# Altium PCB PCB.PcbDoc (part 2 of 3)
Units mm, origin at the board's own origin, x right, y up, seen from the top; angles counter-clockwise.
Board outline 224 x 132 mm, 4 copper layers (Top Layer, Signal Layer 1, Signal Layer 2, Bottom Layer), stack 0.778 mm thick; 181 components, 179 nets, 1018 pads, 539 vias.
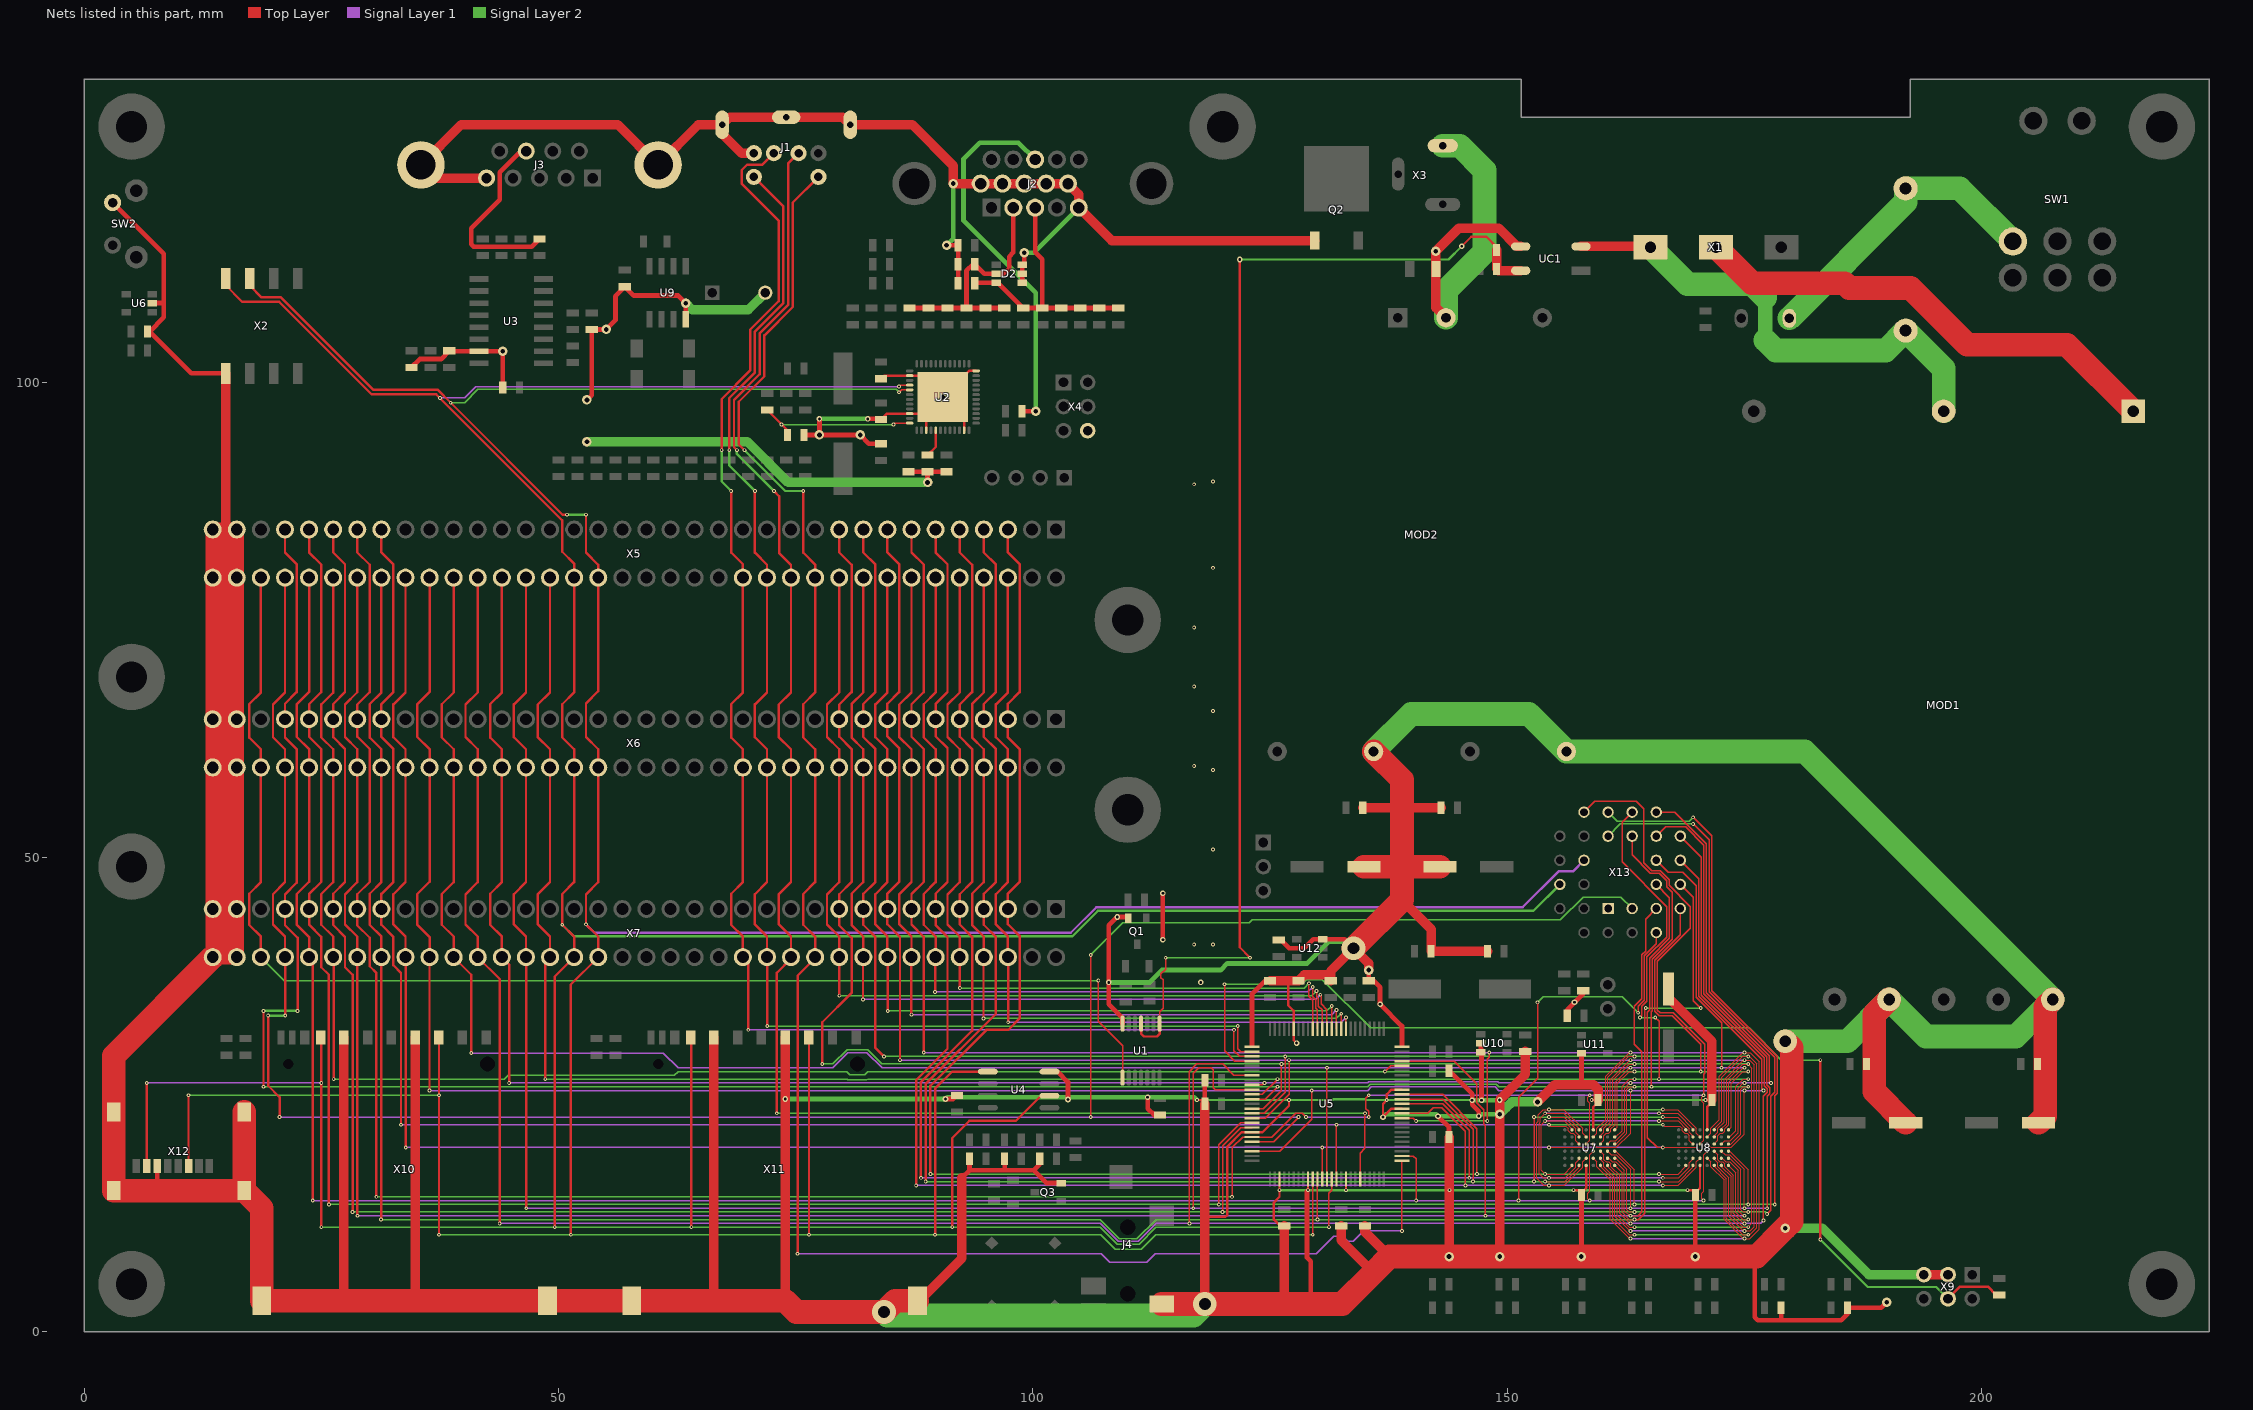
[diagram p4: the nets of this part, all layers, seen from the top]

## Via types
v1: diameter 0.4, hole 0.2, Top Layer to Bottom Layer, tented both sides, 453 vias
v2: diameter 0.6, hole 0.3, Top Layer to Bottom Layer, tented both sides, 46 vias
v3: diameter 1, hole 0.5, Top Layer to Bottom Layer, tented both sides, 34 vias
v4: diameter 2.5, hole 1.25, Top Layer to Bottom Layer, tented both sides, 5 vias
v5: diameter 1, hole 0.5, Top Layer to Bottom Layer, tented bottom, 1 vias

## Nets (pads, with @x,y where several pads share a name; then routed paths per layer and width w, separated by ;. In a path a pad name is that pad's centre, name@x,y a point inside that pad or via, vN(x,y) a via of type N, cw(c..) or ccw(c..) an arc to the next point about the centre after c; other vN are vias at no path point) (continued)
A7: U5.90 U7.C4 U8.C4 X5.57 X6.57 X7.57 | length 213.4
  Top Layer w0.125: v1(154.4,21.8) 154.538,21.662 156.186,21.662 156.435,21.413 156.435,21.138 156.697,20.875 156.973,20.875 157.2,20.648 157.2,20.135 U7.C4@157.573,19.763 ; v1(166.4,21.8) 166.537,21.662 168.186,21.662 168.435,21.413 168.435,21.138 168.697,20.875 168.973,20.875 169.2,20.648 169.2,20.135 U8.C4@169.573,19.763
  Top Layer w0.15: U5.90@132,16.075 v1(132,21.8)
  Top Layer w0.25: X5.57@31.33,84.54 31.33,82.13 32.6,80.86 32.6,67.4 31.33,66.13 31.33,62.67 32.6,61.4 32.6,47.4 31.33,46.13 31.33,42.87 32.6,41.6 32.6,38.6 33.4,37.8 v1(33.4,21.8)
  Signal Layer 1 w0.15: v1(33.4,21.8) v1(154.4,21.8)
  Signal Layer 2 w0.15: v1(154.4,21.8) v1(166.4,21.8)
A8: U5.70 U7.D4 U8.D4 X5.59 X6.59 X7.59 X13.18 | length 277.8
  Top Layer w0.125: U7.D4@158.323,19.763 158.7,20.14 158.7,24.052 158.5,24.252 158.5,24.7 v1(158.7,24.9) ; U8.D4@170.323,19.763 170.7,20.14 170.7,24.052 170.5,24.252 170.5,24.7 v1(170.7,24.9)
  Top Layer w0.15: v1(121,14.2) 121,19.4 122.1,20.5 U5.70@123.1,20.5 125.2,20.5 127.7,23 128.4,23 v1(128.8,22.6) ; v1(135.4,22.6) 135.4,23.2 135.1,23.5 135.1,24.6 v1(135.4,24.9) ; X13.18@158.09,54.75 159.24,55.9 163.6,55.9 164.4,55.1 164.4,49.389 165.214,48.575 166.114,48.575 167.075,47.614 167.075,47.025 169.3,44.8 169.3,42.5 165.825,39.025 165.825,33.875 166.125,33.575 167.514,33.575 170.8,30.289 170.8,27.2 170.7,27.1 v1(170.7,24.9)
  Top Layer w0.25: X5.59@28.79,84.54 28.79,82.13 30.1,80.82 30.1,67.4 28.79,66.09 28.79,62.71 30.1,61.4 30.1,47.4 28.79,46.09 28.79,42.81 30.1,41.5 30.1,38.5 30.8,37.8 v1(30.8,14.2)
  Signal Layer 1 w0.15: v1(128.8,22.6) v1(135.4,22.6) ; v1(135.4,24.9) v1(158.7,24.9) v1(170.7,24.9)
  Signal Layer 2 w0.15: v1(30.8,14.2) v1(121,14.2)
A9: U5.68 U7.H2 U8.H2 X5.61 X6.61 X7.61 X13.17 | length 303.3
  Top Layer w0.125: U7.H2@161.323,18.263 161.439,18.263 162.6,17.102 162.6,12.852 162.852,12.6 v1(163.4,12.6) ; U8.H2@173.323,18.263 173.439,18.263 174.6,17.102 174.6,12.852 174.852,12.6 v1(175.4,12.6)
  Top Layer w0.15: v1(120,12.6) 120,19.6 121.9,21.5 U5.68@123.1,21.5 ; v1(169.6,53.5) 171.275,51.825 171.275,35.814 178.2,28.889 178.2,25.222 177.8,24.822 177.8,12.8 v1(177.4,12.4)
  Top Layer w0.25: X5.61@26.25,84.54 26.25,82.13 27.5,80.88 27.5,67.4 26.25,66.15 26.25,62.65 27.5,61.4 27.5,47.4 26.25,46.15 26.25,42.85 27.5,41.6 27.5,38.4 28.3,37.6 v1(28.3,12.6)
  Signal Layer 2 w0.15: v1(28.3,12.6) v1(163.4,12.6) v1(175.4,12.6) 177.2,12.6 v1(177.4,12.4) ; X13.17@160.63,52.21 161.92,53.5 v1(169.6,53.5)
A10: U5.67 U7.H3 U8.H3 X5.63 X6.63 X7.63 X13.16 | length 304.5
  Top Layer w0.125: U7.H3@161.323,19.013 161.441,19.013 163.4,17.054 v1(163.4,13.4) ; U8.H3@173.323,19.013 173.441,19.013 175.4,17.054 v1(175.4,13.4)
  Top Layer w0.15: v1(119.6,13.4) 119.6,19.7 121.9,22 U5.67@123.1,22 ; v1(169.6,54.2) 171.55,52.25 171.55,35.928 178.475,29.003 178.475,25.108 178.2,24.833 v1(178.2,13.4)
  Top Layer w0.25: X5.63@23.71,84.54 23.71,82.13 25,80.84 25,67.4 23.71,66.11 23.71,62.69 25,61.4 25,47.4 23.71,46.11 23.71,42.89 25,41.6 25,38.4 25.8,37.6 v1(25.8,13.4)
  Signal Layer 2 w0.15: v1(25.8,13.4) v1(163.4,13.4) v1(175.4,13.4) v1(178.2,13.4) ; X13.16@160.63,54.75 161.605,53.775 169.175,53.775 v1(169.6,54.2)
A11: U5.62 U7.H4 U8.H4 X5.65 X6.65 X7.65 X13.15 | length 269.1
  Top Layer w0.125: U7.H4@161.323,19.763 161.463,19.763 162.612,20.912 162.612,25.561 162.852,25.8 v1(163.4,25.8) ; U8.H4@173.323,19.763 173.563,19.763 174.613,20.813 174.613,25.561 174.852,25.8 v1(175.4,25.8)
  Top Layer w0.15: U5.62@123.1,24.5 124.5,24.5 v1(125.8,25.8) ; X13.15@163.17,52.21 163.17,50.23 165.1,48.3 166,48.3 166.8,47.5 166.8,46.9 167.375,46.325 167.375,41.353 165.275,39.253 165.275,33.786 165.2,33.711 v1(165.2,25.8)
  Top Layer w0.25: v1(18.9,25.8) v1(18.9,33.8) ; X5.65@21.17,84.54 21.17,82.13 22.4,80.9 22.4,67.4 21.17,66.17 21.17,62.63 22.4,61.4 22.4,47.3 21.17,46.07 21.17,42.83 22.5,41.5 v1(22.5,33.8)
  Signal Layer 2 w0.15: v1(18.9,25.8) v1(125.8,25.8) 135.311,25.8 135.561,26.05 148.85,26.05 149.1,25.8 v1(163.4,25.8) v1(175.4,25.8)
  Signal Layer 2 w0.25: v1(18.9,33.8) v1(22.5,33.8)
A12: U5.61 U7.H5 U8.H5 X5.44 X6.44 X7.44 X13.14 | length 233.6
  Top Layer w0.125: U7.H5@161.323,20.513 161.452,20.513 162.113,21.173 162.113,25.86 162.852,26.6 v1(163.4,26.6) ; U8.H5@173.323,20.513 173.452,20.513 174.112,21.173 174.112,25.86 174.852,26.6 v1(175.4,26.6)
  Top Layer w0.15: U5.61@123.1,25 124.2,25 v1(125.8,26.6) ; X13.14@163.17,54.75 162.1,53.68 162.1,49.5 166.825,44.775 166.825,41.581 164.725,39.481 164.725,34.825 164.2,34.3 164.2,33.3 v1(164,33.1) ; v1(165.6,33.1) 166,32.7 v1(166,26.6)
  Top Layer w0.25: v1(48.6,26.6) 48.6,38.95 X7.44@49.11,39.46 49.11,41.63 47.8,42.94 47.8,46.06 49.11,47.37 49.11,61.37 47.8,62.68 47.8,66.06 49.11,67.37 X5.44@49.11,79.46
  Signal Layer 2 w0.15: v1(48.6,26.6) 80.422,26.6 80.497,26.525 82.503,26.525 82.578,26.6 v1(125.8,26.6) v1(163.4,26.6) v1(175.4,26.6) ; v1(164,33.1) v1(165.6,33.1)
A13: U5.60 U7.G3 U8.G3 X5.46 X6.46 X7.46 X13.13 | length 284.3
  Top Layer w0.125: U7.G3@160.573,19.013 160.96,18.625 161.475,18.625 163,17.1 v1(163,13) ; U8.G3@172.573,19.013 172.96,18.625 173.475,18.625 175,17.1 v1(175,13)
  Top Layer w0.15: v1(116.9,13) 116.9,27.2 117.5,27.8 118.8,27.8 119,27.6 119,25.7 119.2,25.5 U5.60@123.1,25.5 ; X13.13@165.71,52.21 166.7,53.2 168.8,53.2 170.725,51.275 170.725,35.586 177.363,28.949 177.363,26.026 177.675,25.714 177.675,25.086 177.4,24.811 v1(177.4,13)
  Top Layer w0.25: v1@46.57,13 v1(46.6,13) 46.6,39.43 X7.46@46.57,39.46 46.57,41.63 45.3,42.9 45.3,46.1 46.57,47.37 46.57,61.37 45.3,62.64 45.3,66.1 46.57,67.37 X5.46@46.57,79.46
  Signal Layer 1 w0.15: v1(46.6,13) v1(163,13) v1(175,13) v1(177.4,13)
A14: U5.59 U7.G4 U8.G4 X5.48 X6.48 X7.48 X13.12 | length 240.4
  Top Layer w0.125: U7.G4@160.573,19.763 160.935,20.125 161.45,20.125 162.362,21.037 162.362,25.664 162.898,26.2 v1(163,26.2) ; U8.G4@172.573,19.763 172.935,20.125 173.525,20.125 174.363,20.963 174.363,25.664 174.898,26.2 v1(175,26.2)
  Top Layer w0.15: U5.59@123.1,26 124.2,26 v1(124.4,26.2) ; X13.12@165.71,54.75 167.639,54.75 171,51.389 171,35.7 177.638,29.062 177.638,26.362 v1(177.8,26.2)
  Top Layer w0.25: X5.48@44.03,79.46 44.03,67.37 42.8,66.14 42.8,62.6 44.03,61.37 44.03,47.37 42.8,46.14 42.8,42.86 44.03,41.63 X7.48@44.03,39.46 44.8,38.69 v1(44.8,26.2)
  Signal Layer 1 w0.15: v1(44.8,26.2) v1(124.4,26.2) 135.3,26.2 135.425,26.325 148.975,26.325 149.1,26.2 v1(163,26.2) v1(175,26.2) v1(177.8,26.2)
A15: U5.57 U7.F3 U8.F3 X5.50 X6.50 X7.50 X13.11 | length 292.2
  Top Layer w0.125: U7.F3@159.823,19.013 160.2,18.635 160.2,18.123 160.423,17.9 160.698,17.9 160.935,17.663 160.935,17.365 161.85,16.45 161.85,12.448 162.898,11.4 v1(163,11.4) ; U8.F3@171.823,19.013 172.2,18.635 172.2,18.123 172.423,17.9 172.698,17.9 172.935,17.663 172.935,17.365 173.85,16.45 173.85,12.448 174.898,11.4 v1(175,11.4)
  Top Layer w0.15: v1(116.5,11.4) 116.5,27.4 117.3,28.2 120,28.2 121.2,27 U5.57@123.1,27 ; X13.11@168.25,52.21 170.45,50.01 170.45,35.472 177.088,28.835 177.088,25.912 177.4,25.6 177.4,25.2 177,24.8 v1(177,11.7)
  Top Layer w0.25: X5.50@41.49,79.46 41.49,67.37 40.2,66.08 40.2,62.66 41.49,61.37 41.49,47.37 40.2,46.08 40.2,42.92 41.49,41.63 X7.50@41.49,39.46 43.8,37.15 v1(43.8,11.4)
  Signal Layer 1 w0.15: v1(43.8,11.4) 107.111,11.4 109.011,9.5 111.089,9.5 112.989,11.4 v1(163,11.4) v1(175,11.4) 176.7,11.4 v1(177,11.7)
A16: U5.88 U7.F4 U8.F4 X5.52 X6.52 X7.52 X13.10 | length 245.6
  Top Layer w0.125: U7.F4@159.823,19.763 160.2,20.14 160.2,20.653 160.447,20.9 160.722,20.9 160.935,21.113 160.935,21.388 161.362,21.815 161.362,26.264 162.898,27.8 v1(163,27.8) ; U8.F4@171.823,19.763 172.2,20.14 172.2,20.653 172.447,20.9 172.722,20.9 172.935,21.113 172.935,21.388 173.362,21.815 173.362,26.264 174.898,27.8 v1(175,27.8)
  Top Layer w0.15: U5.88@131,16.075 v1(131,27.8) ; X13.10@165.71,49.67 166.98,48.4 168.5,48.4 169.9,47 169.9,35.244 172.6,32.544 v1(172.6,27.8)
  Top Layer w0.25: X5.52@38.95,79.46 38.95,67.37 37.7,66.12 37.7,62.62 38.95,61.37 38.95,47.37 37.7,46.12 37.7,42.88 38.95,41.63 X7.52@38.95,39.46 40.8,37.61 v1(40.8,29.35)
  Signal Layer 1 w0.15: v1(40.8,29.35) 61.05,29.35 62.6,27.8 78.9,27.8 80.5,29.4 82.5,29.4 84.1,27.8 v1(163,27.8) v1(175,27.8)
A17: U5.73 U7.E4 U8.E4 X5.54 X6.54 X7.54 X13.9 | length 254.2
  Top Layer w0.125: U7.E4@159.073,19.763 159.435,19.4 161.5,19.4 163,20.9 v1(163,25.4) ; U8.E4@171.073,19.763 171.435,19.4 173.6,19.4 175,20.8 v1(175,25.4)
  Top Layer w0.15: U5.73@123.1,19 126,19 129.4,22.4 v1(129.4,25.4) ; X13.9@168.25,49.67 170.175,47.745 170.175,35.358 176.813,28.721 176.813,25.587 v1(177,25.4)
  Top Layer w0.25: v1(36.4,25.4) 36.4,39.45 X7.54@36.41,39.46 36.41,41.59 35.1,42.9 35.1,46.1 36.41,47.41 36.41,61.39 35.1,62.7 35.1,66.1 36.41,67.41 X5.54@36.41,79.46
  Signal Layer 1 w0.15: v1(36.4,25.4) v1(129.4,25.4) 135.3,25.4 135.675,25.775 148.725,25.775 149.1,25.4 v1(163,25.4) v1(175,25.4) v1(177,25.4)
A18: U5.87 U7.D3 U8.D3 X5.56 X6.56 X7.56 X13.8 | length 236.5
  Top Layer w0.125: v1(154.4,19.4) 157.935,19.4 U7.D3@158.323,19.013 ; 165.8,19.4 v1(166.4,19.4) 169.935,19.4 U8.D3@170.323,19.013
  Top Layer w0.15: U5.87@130.5,16.075 v1(130.5,19.4) ; X13.8@165.71,47.13 167.1,45.74 167.1,41.467 165,39.367 165,33.9 164.75,33.65 164.75,20.45 165.8,19.4
  Top Layer w0.25: X5.56@33.87,79.46 33.87,67.37 32.6,66.1 32.6,62.64 33.87,61.37 33.87,47.37 32.6,46.1 32.6,42.9 33.87,41.63 X7.56@33.87,39.46 33.9,39.43 v1(33.9,19.4)
  Signal Layer 1 w0.15: v1(33.9,19.4) v1(154.4,19.4) v1(166.4,19.4)
A19: U5.86 U7.H1 U8.H1 X5.58 X6.58 X7.58 X13.7 | length 276.3
  Top Layer w0.125: U7.H1@161.323,17.513 162.1,16.735 162.1,12.552 162.852,11.8 v1(163.4,11.8) ; U8.H1@173.323,17.513 174.1,16.735 174.1,12.552 174.852,11.8 v1(175.4,11.8)
  Top Layer w0.15: v1(130,11.8) U5.86@130,16.075 ; v1(163.4,11.8) 163.8,11.8 164.475,12.475 164.475,33.975 v1(164.6,34.1) ; X13.7@168.25,47.13 169.625,45.755 169.625,34.875 v1(170.4,34.1)
  Top Layer w0.25: v1(31.3,11.8) 31.3,39.43 X7.58@31.33,39.46 31.33,41.63 30.1,42.86 30.1,46.14 31.33,47.37 31.33,61.37 30.1,62.6 30.1,66.14 31.33,67.37 X5.58@31.33,79.46
  Signal Layer 2 w0.15: v1(31.3,11.8) 107.1,11.8 109.125,9.775 110.975,9.775 113,11.8 v1(163.4,11.8) v1(175.4,11.8) ; v1(164.6,34.1) v1(170.4,34.1)
A20: U5.22 U7.G2 U8.G2 X5.60 X6.60 X7.60 X13.6 | length 288.3
  Top Layer w0.125: U7.G2@160.573,18.263 160.689,18.263 161.051,17.9 161.448,17.9 162.35,16.998 162.35,12.748 162.898,12.2 v1(163,12.2) 163.8,12.2 ; U8.G2@172.573,18.263 172.689,18.263 173.051,17.9 173.448,17.9 174.35,16.998 174.35,12.748 174.898,12.2 v1(175,12.2)
  Top Layer w0.15: U5.22@138.9,28.5 144.4,28.5 146.8,26.1 146.8,24.1 147.5,23.4 147.5,21.9 147.7,21.7 v1(147.7,12.2) ; 163.8,12.2 164.2,12.6 164.2,29.5 163.4,30.3 163.4,34.311 164.175,35.086 164.175,39.708 164.575,40.108 164.575,43.455 X13.6@165.71,44.59
  Top Layer w0.25: X5.60@28.79,79.46 28.79,67.39 27.5,66.1 27.5,62.66 28.79,61.37 28.79,47.37 27.5,46.08 27.5,42.92 28.79,41.63 X7.60@28.79,39.46 28.8,39.45 v1(28.8,12.2)
  Signal Layer 1 w0.15: v1(28.8,12.2) v1(147.7,12.2) v1(163,12.2) v1(175,12.2)
A21: U5.21 U7.H6 U8.H6 X5.62 X6.62 X7.62 X13.5 | length 242.5
  Top Layer w0.125: U7.H6@161.323,21.263 161.612,21.553 161.612,26.16 162.84,27.387 163.387,27.387 v1(163.4,27.4) ; U8.H6@173.323,21.263 173.613,21.553 173.613,26.16 174.839,27.387 175.388,27.387 v1(175.4,27.4)
  Top Layer w0.15: v1(137.1,27.4) 137.7,28 U5.21@138.9,28 ; X13.5@168.25,44.59 168.25,41.839 165.55,39.139 165.55,33.761 166.011,33.3 167.4,33.3 170.4,30.3 v1(170.4,27.4)
  Top Layer w0.25: X5.62@26.25,79.46 26.25,67.35 25,66.1 25,62.62 26.25,61.37 26.25,47.37 25,46.12 25,42.88 26.25,41.63 X7.62@26.25,39.46 26.3,39.41 v1(26.3,26.6)
  Signal Layer 2 w0.15: v1(26.3,26.6) 44.3,26.6 44.7,27 62.2,27 62.6,27.4 80.4,27.4 80.725,27.075 82.275,27.075 82.6,27.4 v1(163.4,27.4) v1(175.4,27.4)
A22: U5.2 U7.E3 U8.E3 X5.64 X6.64 X7.64 X13.4 | length 274
  Top Layer w0.125: v1(158.7,13.8) 158.5,14 158.5,14.6 158.7,14.8 158.7,18.64 U7.E3@159.073,19.013 ; v1(170.7,13.8) 170.5,14 170.5,14.6 170.7,14.8 170.7,18.64 U8.E3@171.073,19.013
  Top Layer w0.15: U5.2@138.9,18.5 140.1,18.5 140.4,18.2 v1@140.4,13.9 ; v1(151.2,13.8) 151.2,24.7 153.2,26.7 v1(153.2,34.7) ; v1(163.8,33.6) 163.8,34.289 164.45,34.939 164.45,39.595 165.71,40.855 X13.4@165.71,42.05
  Top Layer w0.25: X5.64@23.71,79.46 23.71,67.41 22.4,66.1 22.4,62.7 23.71,61.39 23.71,47.41 22.4,46.1 22.4,42.9 23.71,41.59 X7.64@23.71,39.46 24.1,39.07 v1@24.1,13.9
  Signal Layer 1 w0.15: v1(24.1,13.8) v1(140.4,13.8) v1(151.2,13.8) v1(170.7,13.8)
  Signal Layer 2 w0.15: v1(153.2,34.7) 153.8,35.3 162.1,35.3 v1(163.8,33.6)
A23: U5.71 X5.66 X6.66 X7.66 X13.3 | length 251.8
  Top Layer w0.15: v1(106.1,22.6) v1(106.1,39.7) ; U5.71@123.1,20 125.4,20 v1(128,22.6)
  Top Layer w0.25: v1(19.4,33.3) 19.4,25.9 20.6,24.7 v1(20.6,22.6) ; X5.66@21.17,79.46 21.17,67.37 19.9,66.1 19.9,62.64 21.17,61.37 21.17,47.37 19.9,46.1 19.9,42.9 21.17,41.63 X7.66@21.17,39.46 21.2,39.43 v1(21.2,33.3)
  Signal Layer 1 w0.15: v1(20.6,22.6) v1(106.1,22.6) v1(128,22.6)
  Signal Layer 2 w0.15: v1(106.1,39.7) 109.5,43.1 122.8,43.1 123.1,43.4 155.6,43.4 158,45.8 161.96,45.8 X13.3@163.17,44.59
  Signal Layer 2 w0.25: v1(19.4,33.3) v1(21.2,33.3)
BLUE: D2.6 J2.3 R20.2 R21.2 R24.2 R25.2 R26.2 R29.2 R31.2 | length 27.2
  Top Layer w0.5: R21.2@93.875,110.5 93.925,110.55 D2.6@96.125,110.55 96.325,110.55 R20.2@99,107.875 R24.2@101,107.875 ; J2.3@100.24,118.46 100.24,113.76 101,113 R24.2@101,107.875 ; R31.2@109,107.875 R29.2@107,107.875 R26.2@105,107.875 R25.2@103,107.875 R24.2@101,107.875
CLK: U1.8 X5.68 X6.68 X7.68 | length 142.6
  Top Layer w0.15: v1(106.9,37) 106.9,32.7 109.455,30.145 U1.8@109.455,26.759
  Top Layer w0.25: X7.68@18.63,39.46 18.63,41.63 17.4,42.86 17.4,46.14 18.63,47.37 18.63,61.37 17.4,62.6 17.4,66.14 18.63,67.37 X5.68@18.63,79.46
  Signal Layer 2 w0.15: X7.68@18.63,39.46 21.09,37 v1(106.9,37)
CTS: J3.8 R34.2 | length 20.2
  Top Layer w0.5: J3.8@46.603,124.42 46.02,124.42 43.8,122.2 43.8,119.3 40.8,116.3 40.8,114.6 41.05,114.35 47.175,114.35 R34.2@48,115.175
D0: U5.15 U7.B1 U7.B6 U8.B1 U8.B6 X5.5 X6.5 X7.5 | length 197.7
  Top Layer w0.125: U7.B1@156.823,17.513 156.823,17.397 156.026,16.6 v1(154,16.6) 153.6,17 153.6,21.793 154,22.193 v1(154,22.2) 156.002,22.2 156.823,21.379 U7.B6@156.823,21.263 ; v1(166,16.6) 168.026,16.6 168.823,17.397 U8.B1@168.823,17.513 ; v1(166,22.2) 168.002,22.2 168.823,21.379 U8.B6@168.823,21.263
  Top Layer w0.15: U5.15@138.9,25 143.2,25 146.8,21.4 v1(146.8,16.6)
  Top Layer w0.25: v1(89.2,16.6) 89.2,25.9 95.1,31.8 97.4,31.8 98.6,33 98.6,41.7 97.37,42.93 97.37,46.17 98.6,47.4 98.6,61.4 97.37,62.63 97.37,66.17 98.6,67.4 98.6,80.9 97.37,82.13 X5.5@97.37,84.54
  Signal Layer 1 w0.15: v1(154,22.2) v1(166,22.2)
  Signal Layer 2 w0.15: v1(89.2,16.6) v1(154,16.6) v1(166,16.6)
D1: U5.14 U7.C1 U7.C5 U8.C1 U8.C5 X5.7 X6.7 X7.7 | length 203.9
  Top Layer w0.125: v1(154,15.8) 156.054,15.8 157.573,17.319 U7.C1@157.573,17.513 ; v1(154.4,22.6) 156,22.6 157.2,21.4 157.2,21.002 157.573,20.629 U7.C5@157.573,20.513 ; v1(166,15.8) 168.054,15.8 169.573,17.319 U8.C1@169.573,17.513 ; v1(166.4,22.6) 168,22.6 169.2,21.4 169.2,21.002 169.573,20.629 U8.C5@169.573,20.513
  Top Layer w0.15: U5.14@138.9,24.5 143.2,24.5 146.4,21.3 v1(146.4,15.8) ; v1(152.825,15.8) v1(152.825,22.6)
  Top Layer w0.25: v1(88.7,15.8) 88.7,26.1 96.1,33.5 96.1,41.6 94.83,42.87 94.83,46.13 96.1,47.4 96.1,61.4 94.83,62.67 94.83,66.13 96.1,67.4 96.1,80.86 94.83,82.13 X5.7@94.83,84.54
  Signal Layer 2 w0.15: v1(88.7,15.8) v1(154,15.8) v1(166,15.8) ; v1(152.825,22.6) v1(154.4,22.6) v1(166.4,22.6)
D2: U5.13 U7.C2 U7.C6 U8.C2 U8.C6 X5.9 X6.9 X7.9 | length 202.1
  Top Layer w0.125: U7.C2@157.573,18.263 157.573,18.147 157.2,17.774 157.2,17.3 156.1,16.2 v1(154.4,16.2) 153.8,16.2 153.35,16.65 153.35,21.896 153.5,22.046 153.5,22.5 v1(154,23) 155.954,23 157.573,21.381 U7.C6@157.573,21.263 ; v1(166,23) 167.954,23 169.573,21.381 U8.C6@169.573,21.263 ; v1(166.4,16.2) 168.1,16.2 169.2,17.3 169.2,17.774 169.573,18.147 U8.C2@169.573,18.263
  Top Layer w0.15: U5.13@138.9,24 143.2,24 146,21.2 v1(146,16.2)
  Top Layer w0.25: v1(88.2,16.2) 88.2,26.3 93.6,31.7 93.6,41.6 92.29,42.91 92.29,46.09 93.6,47.4 93.6,61.4 92.29,62.71 92.29,66.09 93.6,67.4 93.6,80.82 92.29,82.13 X5.9@92.29,84.54
  Signal Layer 1 w0.15: v1(88.2,16.2) v1(154.4,16.2) v1(166.4,16.2) ; v1(154,23) v1(166,23)
D3: U5.11 U7.D2 U7.D5 U8.D2 U8.D5 X5.11 X6.11 X7.11 | length 208.9
  Top Layer w0.125: U7.D2@158.323,18.263 157.935,17.875 157.935,17.328 156.007,15.4 v1(154.4,15.4) 153.852,15.4 153.1,16.152 153.1,22 153.25,22.15 153.25,22.85 153.8,23.4 v1(154.4,23.4) 155.948,23.4 157.935,21.413 157.935,20.9 U7.D5@158.323,20.513 ; v1(166.4,15.4) 168.007,15.4 169.935,17.328 169.935,17.875 U8.D2@170.323,18.263 ; v1(166.4,23.4) 167.948,23.4 169.935,21.413 169.935,20.9 U8.D5@170.323,20.513
  Top Layer w0.15: U5.11@138.9,23 141.6,23 142.2,23.6 143.1,23.6 145.6,21.1 v1(145.6,15.4)
  Top Layer w0.25: v1(87.7,15.4) 87.7,26.5 91,29.8 91,41.6 89.75,42.85 89.75,46.15 91,47.4 91,61.5 89.75,62.75 89.75,66.15 91,67.4 91,80.88 89.75,82.13 X5.11@89.75,84.54
  Signal Layer 1 w0.15: v1(87.7,15.4) v1(154.4,15.4) v1(166.4,15.4)
  Signal Layer 2 w0.15: v1(154.4,23.4) v1(166.4,23.4)
D4: U5.10 U7.E2 U7.E5 U8.E2 U8.E5 X5.13 X6.13 X7.13 | length 235.8
  Top Layer w0.125: U7.E2@159.073,18.263 159.435,17.9 159.435,17.388 160.85,15.973 160.85,11.848 162.898,9.8 v1(163,9.8) ; U7.E5@159.073,20.513 159.46,20.9 159.46,21.413 160.362,22.315 160.362,26.916 162.846,29.4 v1(163,29.4) ; U8.E2@171.073,18.263 171.435,17.9 171.435,17.388 172.85,15.973 172.85,11.848 174.898,9.8 v1(175,9.8) 175.548,9.8 176.55,10.802 176.55,28.45 175.6,29.4 v1(175,29.4) 174.846,29.4 172.362,26.916 172.362,22.315 171.46,21.413 171.46,20.9 U8.E5@171.073,20.513
  Top Layer w0.15: U5.10@138.9,22.5 140.1,22.5 v1(140.4,22.2) ; v1(147.9,22.2) 147.9,28.7 148.1,28.9 v1(148.1,29.4)
  Top Layer w0.25: X5.13@87.21,84.54 87.21,82.13 88.5,80.84 88.5,67.4 87.21,66.11 87.21,62.69 88.5,61.4 88.5,47.4 87.21,46.11 87.21,42.89 88.5,41.6 v1(88.5,29.4)
  Signal Layer 1 w0.15: v1(88.5,29.4) v1(148.1,29.4) v1(163,29.4) v1(175,29.4) ; v1(163,9.8) v1(175,9.8)
  Signal Layer 2 w0.15: v1(140.4,22.2) v1(147.9,22.2)
D5: U5.66 U7.F2 U7.F5 U8.F2 U8.F5 X5.15 X6.15 X7.15 | length 224.6
  Top Layer w0.125: U7.F2@159.823,18.263 159.823,18.147 160.2,17.769 160.2,17.373 161.35,16.223 161.35,12.148 162.898,10.6 v1(163,10.6) ; U7.F5@159.823,20.513 159.823,20.629 160.2,21.006 160.2,21.403 160.862,22.065 160.862,26.564 162.898,28.6 v1(163,28.6) ; U8.F2@171.823,18.263 171.823,18.147 172.2,17.769 172.2,17.373 173.35,16.223 173.35,12.148 174.898,10.6 v1(175,10.6) 175.6,10.6 176.05,11.05 176.05,28.098 175.548,28.6 v1(175,28.6) 174.898,28.6 172.862,26.564 172.862,22.065 172.2,21.403 172.2,21.006 171.823,20.629 U8.F5@171.823,20.513
  Top Layer w0.15: U5.66@123.1,22.5 124.5,22.5 127,25 v1(127,28.6)
  Top Layer w0.25: X5.15@84.67,84.54 84.67,82.13 85.9,80.9 85.9,67.4 84.67,66.17 84.67,62.73 85.9,61.5 85.9,47.4 84.67,46.17 84.67,42.93 86,41.6 v1(86,28.6)
  Signal Layer 1 w0.15: v1(86,28.6) v1(127,28.6) v1(163,28.6) v1(175,28.6) ; v1(163,10.6) v1(175,10.6)
D6: U5.65 U7.F1 U7.F6 U8.F1 U8.F6 X5.17 X6.17 X7.17 | length 226.9
  Top Layer w0.125: U7.F1@159.823,17.513 159.823,17.397 161.1,16.119 161.1,11.952 162.84,10.213 163.387,10.213 v1(163.4,10.2) ; U7.F6@159.823,21.263 159.823,21.379 160.612,22.169 160.612,26.812 162.8,29 v1(163.4,29) ; U8.F1@171.823,17.513 171.823,17.397 173.1,16.119 173.1,11.952 174.839,10.213 175.388,10.213 v1(175.4,10.2) 175.554,10.2 176.3,10.946 176.3,28.202 175.502,29 v1(175.4,29) 174.8,29 172.612,26.812 172.612,22.169 171.823,21.379 U8.F6@171.823,21.263
  Top Layer w0.15: U5.65@123.1,23 124.4,23 126.6,25.2 v1(126.6,29)
  Top Layer w0.25: X5.17@82.13,84.54 82.13,82.13 83.4,80.86 83.4,67.4 82.13,66.13 82.13,62.67 83.4,61.4 83.4,47.4 82.13,46.13 82.13,42.87 83.4,41.6 83.4,29.9 v1(84.3,29)
  Signal Layer 2 w0.15: v1(84.3,29) v1(163.4,29) v1(175.4,29) ; v1(163.4,10.2) v1(175.4,10.2)
D7: U5.64 U7.G1 U7.G6 U8.G1 U8.G6 X5.19 X6.19 X7.19 | length 228.3
  Top Layer w0.125: U7.G1@160.573,17.513 160.573,17.374 161.6,16.346 161.6,12.252 162.852,11 v1(163.4,11) ; U7.G6@160.573,21.263 160.573,21.379 161.113,21.919 161.113,26.46 162.84,28.187 163.387,28.187 v1(163.4,28.2) ; U8.G1@172.573,17.513 172.573,17.374 173.6,16.346 173.6,12.252 174.852,11 v1(175.4,11) 175.8,11.4 175.8,27.775 v1@175.388,28.187 ; U8.G6@172.573,21.263 172.573,21.379 173.112,21.919 173.112,26.46 174.839,28.187 v1@175.388,28.187 ; v1(175.4,28.2) v1@175.388,28.187
  Top Layer w0.15: U5.64@123.1,23.5 124.3,23.5 126.2,25.4 v1(126.2,28.2)
  Top Layer w0.25: v1(77.8,28.2) 77.8,32.6 80.9,35.7 80.9,41.5 79.59,42.81 79.59,46.09 80.9,47.4 80.9,61.4 79.59,62.71 79.59,66.09 80.9,67.4 80.9,80.82 79.59,82.13 X5.19@79.59,84.54
  Signal Layer 2 w0.15: v1(77.8,28.2) 78.911,28.2 80.411,29.7 82.589,29.7 84.089,28.2 v1(163.4,28.2) v1(175.4,28.2) ; v1(163.4,11) v1(175.4,11)
DBG: R39.2 U5.54 X9.4 | length 118.1
  Top Layer w0.15: v1(120.2,36.6) 120.2,29.6 121.3,28.5 U5.54@123.1,28.5
  Top Layer w0.25: v1(183,9.7) v1(183,28.6) ; X9.4@196.46,3.46 197.73,4.73 200.66,4.73 201.535,3.855 R39.2@201.86,3.855
  Signal Layer 2 w0.15: v1(120.2,36.6) 128.3,36.6 128.8,37.1 130.5,37.1 135.6,32 175.5,32 178.9,28.6 v1(183,28.6)
  Signal Layer 2 w0.25: v1(183,9.7) 188,4.7 195.22,4.7 X9.4@196.46,3.46
EARTH: MOD1.1 X1.2 | length 51.2
  Top Layer w2.5: X1.2@172,114.3 175.8,110.5 185.55,110.5 186.05,110 192.5,110 198.5,104 209,104 MOD1.1@216,97
GND: C1.2 C3.1 C5.2 C6.2 C7.2 C8.2 C9.2 C10.2 C11.2 C12.2 C13.2 C14.2 C15.2 C17.1 C18.2 C20.1 C21.1 C22.2 C23.2 C24.2 C25.1 C26.1 C27.1 C28.1 C29.1 C30.1 C31.1 C32.1 C33.1 C35.1 C36.2 C37.1 C38.1 C39.1 C40.1 C41.2 C42.2 C43.2 C44.2 C45.2 C46.2 C47.2 C48.2 C49.2 C50.1 C51.2 C52.2 C53.2 C54.1 D2.1 D2.2 D2.3 J1.0 J1.3 J2.5 J2.6 J2.7 J2.8 J2.9 J2.10 J3.0 J3.5 J4.1 LED1.1 LED2.1 MOD1.5 MOD1.8 MOD2.2 MOD2.4 MOD2.6 Q1.2 Q2.1 Q3.2 R21.1 R22.1 R23.1 R35.1 SW2.1 U1.7 U2.2 U2.10 U2.15 U2.23 U2.36 U2.49 U3.15 U4.4 U5.12 U5.16 U5.25 U5.45 U5.51 U5.69 U5.78 U5.84 U5.92 U6.2 U7.D1 U7.E6 U8.D1 U8.E6 U9.4 U10.2 U10.3 U11.3 U12.3 UC1.3 X2.C4 X3.2 X4.6 X5.69 X5.70 X5.71 X5.72 X6.69 X6.70 X6.71 X6.72 X7.69 X7.70 X7.71 X7.72 X9.3 X9.5 X10.0@18.72,3.25 X10.0@48.82,3.25 X10.3 X10.6 X11.0@57.72,3.25 X11.0@87.82,3.25 X11.3 X11.6 X12.0 X12.6 X13.1 | length 1594.8
  Top Layer w0.25: C7.2@84,96.125 84.629,96.754 U2.10@87.012,96.754 U2.49@88.762,96.754 ; C22.2@84,100.425 84.329,100.754 U2.2@87.012,100.754 88.262,100.754 v5(90.512,98.504) ; U2.15@88.762,95.004 U2.49@88.762,96.754 ; U2.23@92.762,95.004 92.762,96.254 v5(90.512,98.504) ; U2.36@94.012,101.254 93.262,101.254 v5(90.512,98.504) ; v1(117.3,24.4) 117.725,24.4 C30.1@118.125,24 ; 118.125,12.1 120.3,12.1 120.5,12.3 120.5,19.5 122,21 U5.69@123.1,21 124.2,21 127,23.8 v1(127,24.4) ; U5.51@123.1,30 123.1,30.2 ; U5.78@126,16.075 v1(126,14.9) 126,14.2 125.4,13.6 125.4,11.8 126.075,11.125 C31.1@126.5,11.125 ; 126.9,36.975 126.9,34.4 127.5,33.8 U5.45@127.5,31.9 127.5,30.7 v2(127.8,30.4) ; v1(129,14.9) U5.84@129,16.075 ; v1(133,14.9) U5.92@133,16.075 ; U5.12@138.9,23.5 137.8,23.5 v2(136.9,22.6) 136.9,24 v1(137.3,24.4) 137.3,25 137.8,25.5 U5.16@138.9,25.5 ; U5.25@138.9,30 138.9,30.2 ; C25.1@143.875,20.5 C25.1@143.9,20.475 ; v1(157,14.9) C45.2@157.8,14.9 ; C45.2@157.825,14.4 157.825,14.875 C45.2@157.8,14.9 ; U7.D1@158.323,17.513 158.323,15.123 158.1,14.9 C45.2@157.8,14.9 ; v1(158.9,24.4) C43.2@159.575,24.4 ; U7.E6@159.073,21.263 159.073,23.673 C43.2@159.575,24.175 ; v1(169,14.9) C46.2@169.8,14.9 ; C46.2@169.825,14.4 169.825,14.875 C46.2@169.8,14.9 ; U8.D1@170.323,17.513 170.323,15.123 170.1,14.9 C46.2@169.8,14.9 ; v1(170.9,24.4) C44.2@171.575,24.4 ; U8.E6@171.073,21.263 171.073,23.673 C44.2@171.575,24.175 ; U2.49@88.762,96.754 v5(90.512,98.504)
  Top Layer w0.5: SW2.1@3,119 8.4,113.6 8.4,108.4 ; C42.2@6.675,105.4 C42.2@6.9,105.4 ; U6.2@7.175,108.4 8.4,108.4 ; 7.7,14.85 7.705,14.855 X12.6@7.705,17.45 ; X2.C4@14.92,101 11.3,101 C42.2@6.9,105.4 ; R35.1@34.5,101.625 35.375,102.5 37.625,102.5 C15.2@38.5,103.375 38.555,103.32 U3.15@41.6,103.32 v3(44.125,103.32) C20.1@44.125,99.5 ; v3(53,98.2) 53.5,98.7 C21.1@53.5,105.625 v3(55.025,105.625) 56,106.6 56,109.125 C49.2@57,110.125 57.925,109.2 62.6,109.2 v3(63.405,108.395) U9.4@63.405,106.7 ; C11.2@75.875,94.5 v3(81.8,94.5) 82.725,93.575 C24.2@84,93.575 ; v3(77.5,94.5) v2(77.5,96.2) ; v2(82.6,96.2) 83.925,96.2 C7.2@84,96.125 ; C5.2@86.9,90.625 C10.2@88.9,90.625 ; v3(88.9,89.5) C10.2@88.9,90.625 ; v2(90.8,24.5) 91.575,24.5 91.975,24.9 C23.2@92,24.875 ; C6.2@90.9,90.625 C10.2@88.9,90.625 ; v3(90.9,114.5) R23.1@92.125,114.5 R22.1@92.125,112.5 R21.1@92.125,110.5 ; 92.5,16.2 93.325,17.025 C37.1@93.325,18.2 ; 93.325,17 97,17 ; C38.1@97.025,18.2 97.025,17.025 97,17 ; D2.1@98.875,110.55 D2.2@98.875,111.5 D2.3@98.875,112.45 99.1,112.675 v3(99.1,113.7) ; C39.1@100.725,18.2 100.725,17.625 100.1,17 ; U4.4@101.752,27.4 102.6,27.4 103.7,26.3 v2(103.7,24.45) ; Q3.2@102.975,15.65 101.45,15.65 100.1,17 ; U1.7@109.455,32.459 109.455,33.045 108,34.5 v2(108,36.8) 108,42.8 v2(108.9,43.7) 109.925,43.7 Q1.2@110.05,43.575 ; v2(112.1,24.7) 112.1,23.5 112.775,22.825 C47.2@113.4,22.825 ; v2(113.7,41.3) v2(113.7,46.2) ; C30.1@118.125,24 C29.1@118.125,26.5 ; 123.1,30.2 123.1,35.6 124.475,36.975 C28.1@125,36.975 ; C54.1@125.9,41.275 126.125,41.275 127,40.4 128.6,40.4 129.55,41.35 U12.3@130.575,41.35 132.85,41.35 v4(133.8,40.4) ; v1(129,14.9) 128.9,14.8 128.9,7.8 129.3,7.4 129.3,3 129.4,2.9 ; v3(135.4,38.1) C27.1@135.4,36.975 135.925,36.975 136.6,36.3 v2(136.6,34.5) 138.9,32.2 138.9,30.2 ; v2(142.7,22.7) 143.875,21.525 C25.1@143.875,20.5 ; C26.1@143.875,27.2 C26.1@143.875,27.5 146.3,25.075 v2(146.3,24.375) 146.3,23.9 147,23.2 v2(147,22.7) ; U10.2@147.225,30.4 U10.3@147.225,29.45 147.3,29.375 v2(147.3,24.375) ; C50.1@151.9,29.525 C50.1@152.075,29.525 ; C53.2@156.325,33.3 156.325,33.925 v2(157.1,34.7) 158,35.6 C52.2@158,35.925 ; v3(157.8,7.9) 157.825,7.925 C45.2@157.825,14.4 ; 157.8,26 157.825,26.025 ; 157.825,26 157.825,26.025 ; U11.3@157.825,29.35 157.825,26.025 ; v3(169.825,7.9) C46.2@169.825,14.4 ; C44.2@171.475,24.5 C44.2@171.575,24.4 ; 176.3,7.9 176.1,7.7 176.1,1.5 176.4,1.2 178.875,1.2 ; LED2.1@178.875,2.5 178.875,1.2 ; v3(190,3.1) 189.4,2.5 LED1.1@185.875,2.5 185.875,1.875 185.2,1.2 178.875,1.2 ; C42.2@6.9,105.4 8.4,106.9 8.4,108.4 ; 97,17 100.1,17
  Top Layer w1: 14.82,84.54 14.92,84.64 X2.C4@14.92,101 ; 27.2,3.25 27.38,3.43 X10.6@27.38,31 ; 34.8,3.25 34.88,3.33 X10.3@34.88,31 ; J3.5@42.412,121.58 36.89,121.58 J3.0@35.5,122.97 39.73,127.2 56.27,127.2 J3.0@60.5,122.97 64.73,127.2 J1.0@67.25,127.2 ; X11.6@66.38,31 66.38,3.27 66.4,3.25 ; J1.3@70.6,124.2 69.3,124.2 67.25,126.25 J1.0@67.25,127.2 ; 73.875,3.25 73.875,30.995 X11.3@73.88,31 ; X11.0@87.82,3.25 88.05,3.25 92.5,7.7 92.5,16.2 ; v4(118.125,2.9) 118.125,12.1 C30.1@118.125,24 ; C28.1@125,36.975 126.9,36.975 C40.1@128,36.975 128.625,37.6 131.4,37.6 ; C31.1@126.5,11.125 126.5,3 126.6,2.9 ; Q2.1@129.725,114.99 108.31,114.99 J2.5@104.84,118.46 104.84,119.86 J2.10@103.7,121 J2.9@101.4,121 J2.8@99.1,121 J2.7@96.8,121 J2.6@94.5,121 v3(91.6,121) 91.6,122.9 87.3,127.2 J1.0@80.75,127.2 79.95,128 J1.0@74,128 68.05,128 J1.0@67.25,127.2 ; C35.1@131.4,36.975 131.4,37.6 ; 132.5,3 132.6,2.9 ; C32.1@132.5,11.125 132.5,9.6 135.9,6.2 ; C13.2@134.775,55.2 138.9,55.2 C17.1@143.025,55.2 ; C33.1@135,11.125 135,10.5 137.6,7.9 ; v3(135.4,38.1) 135.4,38.8 v4(133.8,40.4) 131.4,38 131.4,37.6 ; 138.9,45.5 141.975,42.425 C41.2@141.975,40.1 C36.2@147.925,40.1 ; MOD2.2@143.54,106.86 142.475,107.925 C14.2@142.475,112 v3(142.475,113.875) 144.9,116.3 149.1,116.3 151.03,114.37 UC1.3@151.425,114.37 ; v3(143.875,7.9) C25.1@143.875,20.5 ; v3(149.2,7.9) v3(149.2,22.9) v2(149.2,24.4) 151.9,27.1 C50.1@151.9,29.525 ; v3(153.2,24.2) 155,26 157.8,26 157.825,26 159.1,26 159.575,25.525 C43.2@159.575,24.4 ; C51.2@167,36.1 167,35.175 171.575,30.6 C44.2@171.575,24.4 ; X9.5@193.92,6 X9.3@196.46,6
  Top Layer w1.5: X7.72@13.55,39.46 X5.71@13.55,84.54 14.82,84.54 ; X7.72@13.55,39.46 14.82,40.73 14.82,84.54 ; X7.72@13.55,39.46 X7.70@16.09,39.46 X5.69@16.09,84.54 14.82,84.54
  Top Layer w2.5: X7.72@13.55,39.46 3.125,29.035 X12.0@3.125,23.15 X12.0@3.125,14.85 7.7,14.85 X12.0@16.875,14.85 ; X12.0@16.875,23.15 X12.0@16.875,14.85 ; X11.0@87.82,3.25 85.5,3.25 v4(84.3,2.05) 75.075,2.05 73.875,3.25 66.4,3.25 X11.0@57.72,3.25 X10.0@48.82,3.25 34.8,3.25 27.2,3.25 X10.0@18.72,3.25 18.72,13.005 X12.0@16.875,14.85 ; J4.1@113.6,2.9 v4(118.125,2.9) 126.6,2.9 129.4,2.9 132.6,2.9 135.9,6.2 137.6,7.9 v3(143.875,7.9) v3(149.2,7.9) v3(157.8,7.9) v3(169.825,7.9) 176.3,7.9 v3(179.3,10.9) 180,11.6 180,29.9 v4(179.3,30.6) ; v4(133.8,40.4) 138.9,45.5 138.9,49 ; C12.2@134.9,49 138.9,49 ; MOD2.6@135.92,61.14 138.9,58.16 138.9,55.2 138.9,49 ; C18.2@142.9,49 138.9,49 ; MOD1.5@190.25,35 188.7,33.45 188.7,25.3 C9.2@192,22 ; C1.2@206,22 206.7,22.7 206.7,34.2 MOD1.8@207.5,35
  Signal Layer 2 w0.25: v1@117.25,24.45 v1(117.3,24.4) v1(127,24.4) 131.6,24.4 131.7,24.5 135,24.5 135.1,24.4 v1(137.3,24.4) 146.275,24.4 v2(146.3,24.375) ; v1(126,14.9) v1(133,14.9) v1(157,14.9) v1(169,14.9) ; v2@149.175,24.375 v2(149.2,24.4) ; v1(158.9,24.4) v1(170.9,24.4)
  Signal Layer 2 w0.5: v2(73.9,24.5) v2(90.8,24.5) 91,24.7 103.45,24.7 v2(103.7,24.45) 103.95,24.7 v2(112.1,24.7) 117,24.7 v1@117.25,24.45 ; v2(77.5,96.2) v2(82.6,96.2) ; v3(90.9,114.5) 91.6,115.2 v3(91.6,121) ; v3(99.1,113.7) 100.08,113.7 J2.5@104.84,118.46 ; v2(108,36.8) 112.3,36.8 113.6,38.1 119.8,38.1 120.5,38.8 128.9,38.8 131.2,41.1 133.1,41.1 v4(133.8,40.4) ; v2(136.9,22.6) 137.2,22.9 142.5,22.9 v2(142.7,22.7) v2(147,22.7) 147.2,22.9 v3(149.2,22.9) ; v2(146.3,24.375) v2(147.3,24.375) v2@149.175,24.375 ; v2(149.2,24.4) 149.9,23.7 149.9,23.6
  Signal Layer 2 w1: v3(53,93.8) 69.9,93.8 74.2,89.5 v3(88.9,89.5) ; v3(63.405,108.395) 64.1,107.7 70,107.7 C48.2@71.8,109.5 ; v3(149.2,22.9) 149.9,23.6 150.5,24.2 v3(153.2,24.2) ; v3(179.3,10.9) 183.2,10.9 188.1,6 X9.5@193.92,6
  Signal Layer 2 w2.5: v4(84.3,2.05) 84.65,1.7 116.925,1.7 v4(118.125,2.9) ; MOD2.6@135.92,61.14 139.88,65.1 152.28,65.1 MOD2.4@156.24,61.14 181.36,61.14 184.6,57.9 MOD1.8@207.5,35 203.6,31.1 194.15,31.1 MOD1.5@190.25,35 185.85,30.6 v4(179.3,30.6) ; X3.2@143.2,125 145,125 147.6,122.4 147.6,113.8 143.54,109.74 MOD2.2@143.54,106.86
  other v1: 143.9,14.9 117,40.8 119,40.8 119,50.8 119,59.2 117,59.6 119,65.4 117,68 117,74.2 119,80.5 117,89.3 119,89.6
  other v2: 117.7,36.8
GP0: U5.34 X5.6 X6.6 X7.6 | length 86
  Top Layer w0.15: U5.34@133,31.9 v1(133,33.1)
  Top Layer w0.25: X5.6@97.37,79.46 97.37,67.37 96.1,66.1 96.1,62.64 97.37,61.37 97.37,47.37 96.1,46.1 96.1,42.9 97.37,41.63 X7.6@97.37,39.46 97.4,39.43 v1(97.4,32.6)
  Signal Layer 1 w0.15: v1(97.4,32.6) 132.5,32.6 v1(133,33.1)
GP1: U5.35 X5.8 X6.8 X7.8 | length 88
  Top Layer w0.15: U5.35@132.5,31.9 v1(132.5,33.5)
  Top Layer w0.25: v1(94.8,33) 94.8,39.43 X7.8@94.83,39.46 94.83,41.63 93.6,42.86 93.6,46.14 94.83,47.37 94.83,61.37 93.6,62.6 93.6,66.14 94.83,67.37 X5.8@94.83,79.46
  Signal Layer 2 w0.15: v1(94.8,33) 132,33 v1(132.5,33.5)
GP2: U5.41 X5.10 X6.10 X7.10 | length 87.4
  Top Layer w0.15: v1(129.1,36.7) 129.1,35.322 129.5,34.922 U5.41@129.5,31.9
  Top Layer w0.25: X5.10@92.29,79.46 92.29,67.37 91,66.08 91,62.66 92.29,61.37 92.29,47.37 91,46.08 91,42.92 92.29,41.63 X7.10@92.29,39.46 92.3,39.45 v1(92.3,36.2)
  Signal Layer 2 w0.15: v1(92.3,36.2) 128.6,36.2 v1(129.1,36.7)
GP3: U5.40 X5.12 X6.12 X7.12 | length 90.4
  Top Layer w0.15: v1(129.5,36.3) 129.5,35.311 129.825,34.986 129.825,34.075 130,33.9 U5.40@130,31.9
  Top Layer w0.25: v1(89.7,35.8) 89.7,39.41 X7.12@89.75,39.46 89.75,41.63 88.5,42.88 88.5,46.12 89.75,47.37 89.75,61.37 88.5,62.62 88.5,66.12 89.75,67.37 X5.12@89.75,79.46
  Signal Layer 1 w0.15: v1(89.7,35.8) 129,35.8 v1(129.5,36.3)
GP4: U5.36 X5.14 X6.14 X7.14 | length 95.2
  Top Layer w0.15: U5.36@132,31.9 v1(132,33.9)
  Top Layer w0.25: v1(87.2,33.4) 87.2,39.45 X7.14@87.21,39.46 87.21,41.63 85.9,42.94 85.9,46.06 87.21,47.37 87.21,61.37 85.9,62.68 85.9,66.06 87.21,67.37 X5.14@87.21,79.46
  Signal Layer 1 w0.15: v1(87.2,33.4) 131.5,33.4 v1(132,33.9)
GP5: U5.37 X5.16 X6.16 X7.16 | length 97.2
  Top Layer w0.15: U5.37@131.5,31.9 v1(131.5,34.3)
  Top Layer w0.25: X5.16@84.67,79.46 84.67,67.37 83.4,66.1 83.4,62.64 84.67,61.37 84.67,47.37 83.4,46.1 83.4,42.9 84.67,41.63 X7.16@84.67,39.46 84.7,39.43 v1(84.7,33.8)
  Signal Layer 2 w0.15: v1(84.7,33.8) 131,33.8 v1(131.5,34.3)
GP6: U5.38 X5.18 X6.18 X7.18 | length 98.8
  Top Layer w0.15: v1(130.3,35.5) 130.375,35.425 130.375,34.525 131,33.9 U5.38@131,31.9
  Top Layer w0.25: v1(82.1,35) 82.1,39.43 X7.18@82.13,39.46 82.13,41.63 80.9,42.86 80.9,46.14 82.13,47.37 82.13,61.37 80.9,62.6 80.9,66.14 82.13,67.37 X5.18@82.13,79.46
  Signal Layer 1 w0.15: v1(82.1,35) 129.8,35 v1(130.3,35.5)
GP7: U5.39 X5.20 X6.20 X7.20 | length 101
  Top Layer w0.15: v1(129.9,35.9) 129.9,35.3 130.1,35.1 130.1,34.3 130.5,33.9 U5.39@130.5,31.9
  Top Layer w0.25: X5.20@79.59,79.46 79.59,67.37 78.3,66.08 78.3,62.66 79.59,61.37 79.59,47.37 78.3,46.08 78.3,42.92 79.59,41.63 X7.20@79.59,39.46 79.6,39.45 v1(79.6,35.4)
  Signal Layer 2 w0.15: v1(79.6,35.4) 129.4,35.4 v1(129.9,35.9)
GP8: J1.6 U5.1 X5.22 X6.22 X7.22 | length 197.6
  Top Layer w0.15: v1(138.9,10.6) U5.1@138.9,18
  Top Layer w0.25: v1(69.6,92.9) 69,93.5 69,98 71.7,100.7 71.7,105 74.7,108 74.7,119 J1.6@77.4,121.7 ; v1(75.2,8.2) 75.2,37.5 77.05,39.35 77.05,41.63 75.8,42.88 75.8,46.12 77.05,47.37 77.05,61.37 75.8,62.62 75.8,66.12 77.05,67.37 X5.22@77.05,79.46 77.05,80.85 75.8,82.1 v1(75.8,88.6)
  Signal Layer 1 w0.15: v1(75.2,8.2) 107.2,8.2 108.1,7.3 112,7.3 112.9,8.2 129.878,8.2 131.728,10.05 132.661,10.05 133.211,9.5 133.789,9.5 134.889,10.6 v1(138.9,10.6)
  Signal Layer 2 w0.25: v1(69.6,92.9) 73.9,88.6 v1(75.8,88.6)
GP9: J1.2 U5.95 X5.24 X6.24 X7.24 | length 178.4
  Top Layer w0.15: U5.95@134.5,16.075 134.5,18.8 135,19.3 v1(135,23)
  Top Layer w0.25: v1(68.8,92.9) 68.5,93.2 68.5,98.2 71.2,100.9 71.2,105.2 74.2,108.2 74.2,123.1 J1.2@75.3,124.2 ; v1(72.7,88.6) 73.25,88.05 73.25,82.05 74.51,80.79 X5.24@74.51,79.46 74.51,67.37 73.2,66.06 73.2,62.68 74.51,61.37 74.51,47.37 73.2,46.06 73.2,42.94 74.51,41.63 74.51,39.31 73,37.8 v1(73,23)
  Signal Layer 2 w0.15: v1(73,23) v1(135,23)
  Signal Layer 2 w0.25: v1(68.8,92.9) 68.8,92.5 v1(72.7,88.6)
GP10: J1.5 U5.52 X5.26 X6.26 X7.26 | length 150.5
  Top Layer w0.15: v1(121.6,32.2) 121.6,29.8 121.9,29.5 U5.52@123.1,29.5
  Top Layer w0.25: v1(68,92.9) 68,98.4 70.7,101.1 70.7,105.4 73.7,108.4 73.7,118.6 J1.5@70.6,121.7 ; v1(70.7,88.6) 70.7,82.1 71.97,80.83 71.97,67.37 70.7,66.1 70.7,62.64 71.97,61.37 71.97,47.37 70.7,46.1 70.7,42.9 71.97,41.63 X7.26@71.97,39.46 72,39.43 v1(72,32.2)
  Signal Layer 2 w0.15: v1(72,32.2) v1(121.6,32.2)
  Signal Layer 2 w0.25: v1(68,92.9) 68,91.3 v1(70.7,88.6)
GP11: J1.1 U5.53 X5.28 X6.28 X7.28 | length 157.7
  Top Layer w0.15: v1(121.2,31.8) 121.2,29.6 121.8,29 U5.53@123.1,29
  Top Layer w0.25: v1(67.2,92.9) 67.2,98.3 70.2,101.3 70.2,105.6 73.2,108.6 73.2,117.1 69.3,121 69.3,122.4 69.9,123 71.5,123 J1.1@72.7,124.2 ; v1(68.2,88.6) 68.2,82.1 69.43,80.87 69.43,67.37 68.2,66.14 68.2,62.6 69.43,61.37 69.43,47.37 68.2,46.14 68.2,42.86 69.43,41.63 X7.28@69.43,39.46 ; X7.28@69.43,39.4 X7.28@69.43,39.46 ; v1(70,31.8) 70,38.89 X7.28@69.43,39.46
  Signal Layer 1 w0.15: v1(70,31.8) v1(121.2,31.8)
  Signal Layer 2 w0.25: v1(67.2,92.9) 67.2,89.6 v1(68.2,88.6)
GREEN: D2.5 J2.2 R13.2 R14.2 R16.2 R17.2 R18.2 R19.2 R22.2 | length 26
  Top Layer w0.5: R13.2@87,107.875 R14.2@89,107.875 R16.2@91,107.875 R17.2@93,107.875 ; R19.2@97,107.875 R18.2@95,107.875 R17.2@93,107.875 ; J2.2@97.94,118.46 97.94,113.74 97.5,113.3 97.5,112 97,111.5 D2.5@96.125,111.5 94.875,111.5 R22.2@93.875,112.5 93.7,112.5 93,111.8 R17.2@93,107.875
HSYNC: J2.13 R37.2 | length 40.1
  Top Layer w0.5: R37.2@98.875,97 v3(100.3,97)
  Signal Layer 2 w0.5: J2.13@100.24,123.54 98.48,125.3 94.4,125.3 92.7,123.6 92.7,117.1 100.3,109.5 v3(100.3,97)
MISO: U2.4 U4.2 U5.89 X2.C8 X5.42 X6.42 X7.42 X10.7 X11.7 X12.7 X13.23 | length 484
  Top Layer w0.15: v1(85.9,99.6) 86.054,99.754 U2.4@87.012,99.754 ; v1(131.2,11) 131.2,14.6 131.5,14.9 U5.89@131.5,16.075
  Top Layer w0.25: v1(6.6,26.2) 6.6,17.455 X12.7@6.605,17.45 ; X2.C8@14.92,111 14.92,110.28 16.65,108.55 20.55,108.55 30.3,98.8 37.1,98.8 50.4,85.5 50.4,82.2 51.65,80.95 51.65,67.37 50.4,66.12 50.4,62.62 51.65,61.37 51.65,47.37 50.4,46.12 v1(50.4,42.88) 51.65,41.63 X7.42@51.65,39.46 49.6,37.41 v1(49.6,11) ; X10.7@24.95,31 25,30.95 v1(25,26.2) v1(25,11) ; X11.7@63.95,31 64,30.95 v1(64,11) ; v1(91.5,11) 91.5,20.4 93.3,22.2 98.2,22.2 100.86,24.86 U4.2@101.752,24.86
  Signal Layer 1 w0.15: v1(6.6,26.2) v1(25,26.2) ; v1(37.5,98.4) 40.1,98.4 41.3,99.6 v1(85.9,99.6)
  Signal Layer 2 w0.15: v1(25,11) v1(49.6,11) v1(64,11) v1(91.5,11) 107.122,11 108.897,9.225 111.203,9.225 112.978,11 v1(131.2,11)
  Signal Layer 2 w0.25: v1(50.4,42.88) 51.63,41.65 104.15,41.65 106.85,44.35 152.77,44.35 X13.23@155.55,47.13
MOSI: U2.5 U4.5 U5.85 X2.C7 X5.40 X6.40 X7.40 X10.2 X11.2 X12.3 X13.22 | length 480.3
  Top Layer w0.15: v1(85.9,99) 86.154,99.254 U2.5@87.012,99.254 ; v1(129.5,10.2) U5.85@129.5,16.075
  Top Layer w0.25: v1(11,24.9) 11,17.455 X12.3@11.005,17.45 ; X2.C7@17.46,111 17.46,110.24 18.7,109 20.736,109 30.486,99.25 37.286,99.25 v1(38.636,97.9) 50.436,86.1 v1(50.9,86.1) ; X10.2@37.38,31 37.4,30.98 v1(37.4,24.9) v1(37.4,10.2) ; v1(51.3,10.2) 51.3,36.57 X7.40@54.19,39.46 54.19,41.63 v1(52.9,42.92) 52.9,46.08 54.19,47.37 54.19,61.37 52.9,62.66 52.9,66.21 54.19,67.5 54.19,80.81 52.9,82.1 v1(52.9,86.1) ; X11.2@76.38,31 76.4,30.98 v1(76.4,10.2) ; v1(89.7,10.2) 89.7,25.6 91.5,27.4 U4.5@95.252,27.4
  Signal Layer 1 w0.25: v1(52.9,42.92) 53.795,42.025 103.995,42.025 106.695,44.725 151.625,44.725 155.4,48.5 156.92,48.5 X13.22@158.09,49.67
  Signal Layer 2 w0.15: v1(11,24.9) v1(37.4,24.9) ; v1(37.4,10.2) v1(51.3,10.2) v1(76.4,10.2) v1(89.7,10.2) 107.144,10.2 108.669,8.675 111.431,8.675 112.956,10.2 124.266,10.2 v1(129.5,10.2) ; v1(38.636,97.9) 40.1,97.9 41.5,99.3 85.6,99.3 v1(85.9,99)
  Signal Layer 2 w0.25: v1(50.9,86.1) v1(52.9,86.1)
NetC2_1: C2.1 F1.1 SW1.1 | length 32.4
  Signal Layer 2 w2.5: F1.1@179.74,106.8 192,119.06 C2.1@192,120.5 197.701,120.5 SW1.1@203.301,114.9
NetC2_2: C2.2 MOD1.2 UC1.2 X1.3 | length 52.4
  Top Layer w1: UC1.2@157.775,114.37 165.03,114.37 X1.3@165.1,114.3
  Signal Layer 2 w1.5: 177.2,104.5 177.2,109
  Signal Layer 2 w2.5: X1.3@165.1,114.3 169,110.4 175.8,110.4 177.2,109 ; 177.2,104.5 178.3,103.4 189.9,103.4 C2.2@192,105.5 196,101.5 MOD1.2@196,97
NetC4_1: C4.1 R2.1 U1.1 U1.4 UC1.4 | length 128.2
  Top Layer w0.15: U1.1@113.355,32.459 113.355,33.695 113.725,34.065 113.725,37.075 113.5,37.3 113.5,37.7 114,38.2 v1(114,39.4)
  Top Layer w0.25: U1.4@111.405,32.459 111.405,31.395 111.7,31.1 113.1,31.1 113.355,31.355 U1.1@113.355,32.459 ; v2(121.8,113) 121.8,40.5 v1(122.9,39.4) ; v2(145.2,114.4) 146.2,115.4 147.8,115.4 148.875,114.325 C4.1@148.875,114
  Top Layer w1: C4.1@148.875,114 R2.1@148.875,112 149.045,111.83 UC1.4@151.425,111.83
  Signal Layer 2 w0.15: v1(114,39.4) v1(122.9,39.4)
  Signal Layer 2 w0.25: v2(121.8,113) 143.8,113 v2(145.2,114.4)
NetC10_1: C10.1 U2.17 | length 3
  Top Layer w0.25: C10.1@88.9,92.375 89.762,93.237 U2.17@89.762,95.004
NetC11_1: C11.1 R12.2 U2.12 | length 17.1
  Top Layer w0.15: v1(85.3,95.6) 85.454,95.754 U2.12@87.012,95.754
  Top Layer w0.25: R12.2@72,97.125 74.125,95 C11.1@74.125,94.5
  Signal Layer 2 w0.15: v1(73.5,95.6) v1(85.3,95.6)